# Altium PCB mini_lathe_motor_monitor.PcbDoc
Units mm, origin at the board's own origin, x right, y up, seen from the top; angles counter-clockwise.
Board outline 80 x 36 mm, 2 copper layers (1_TOP, 2_BOTTOM), stack 0.833 mm thick; 46 components, 32 nets, 155 pads, 65 vias.
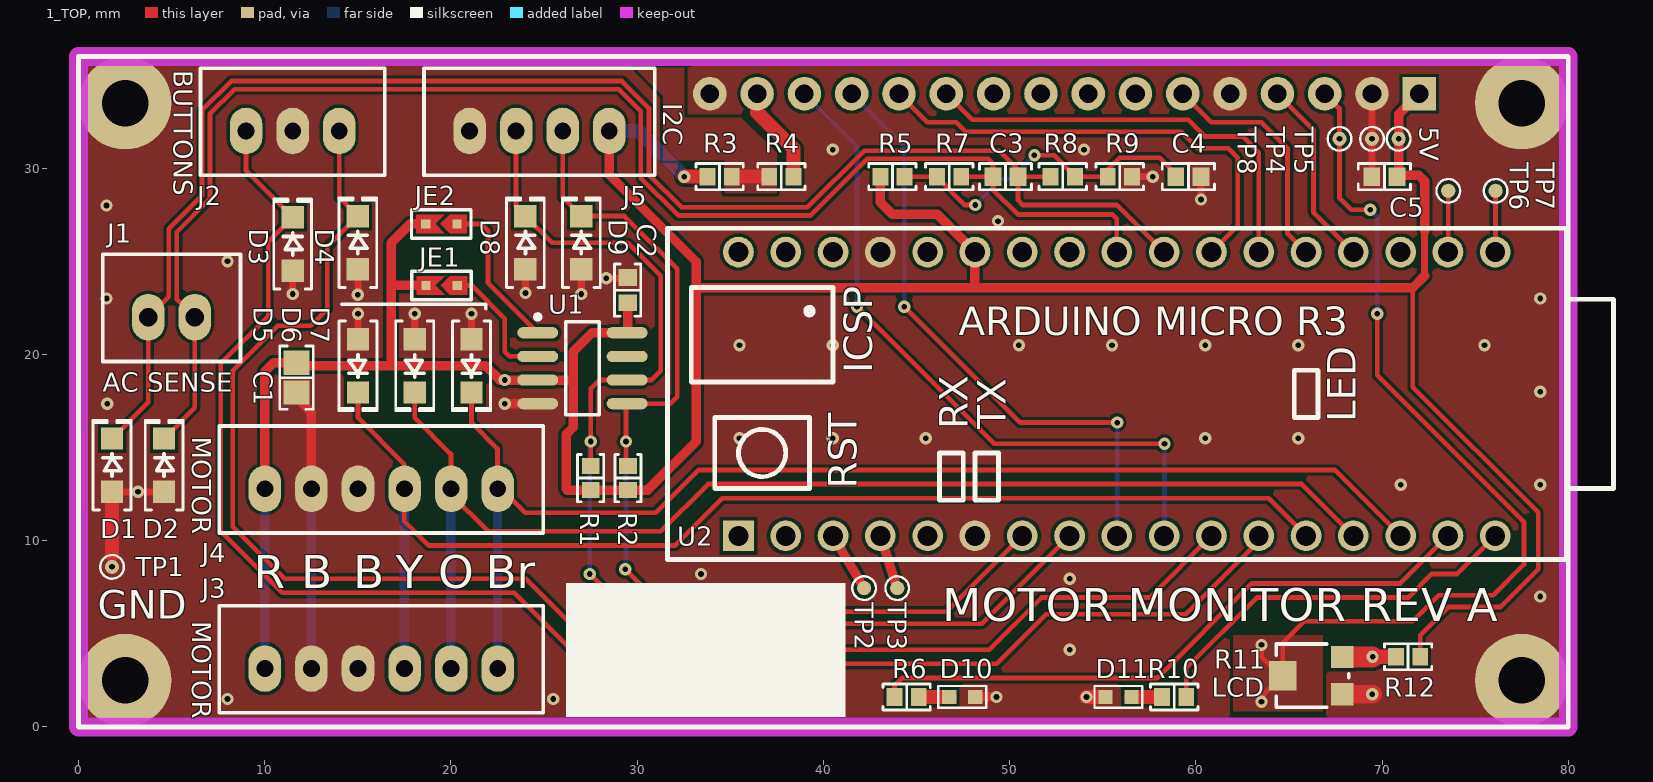
[diagram p0: 1_TOP view]
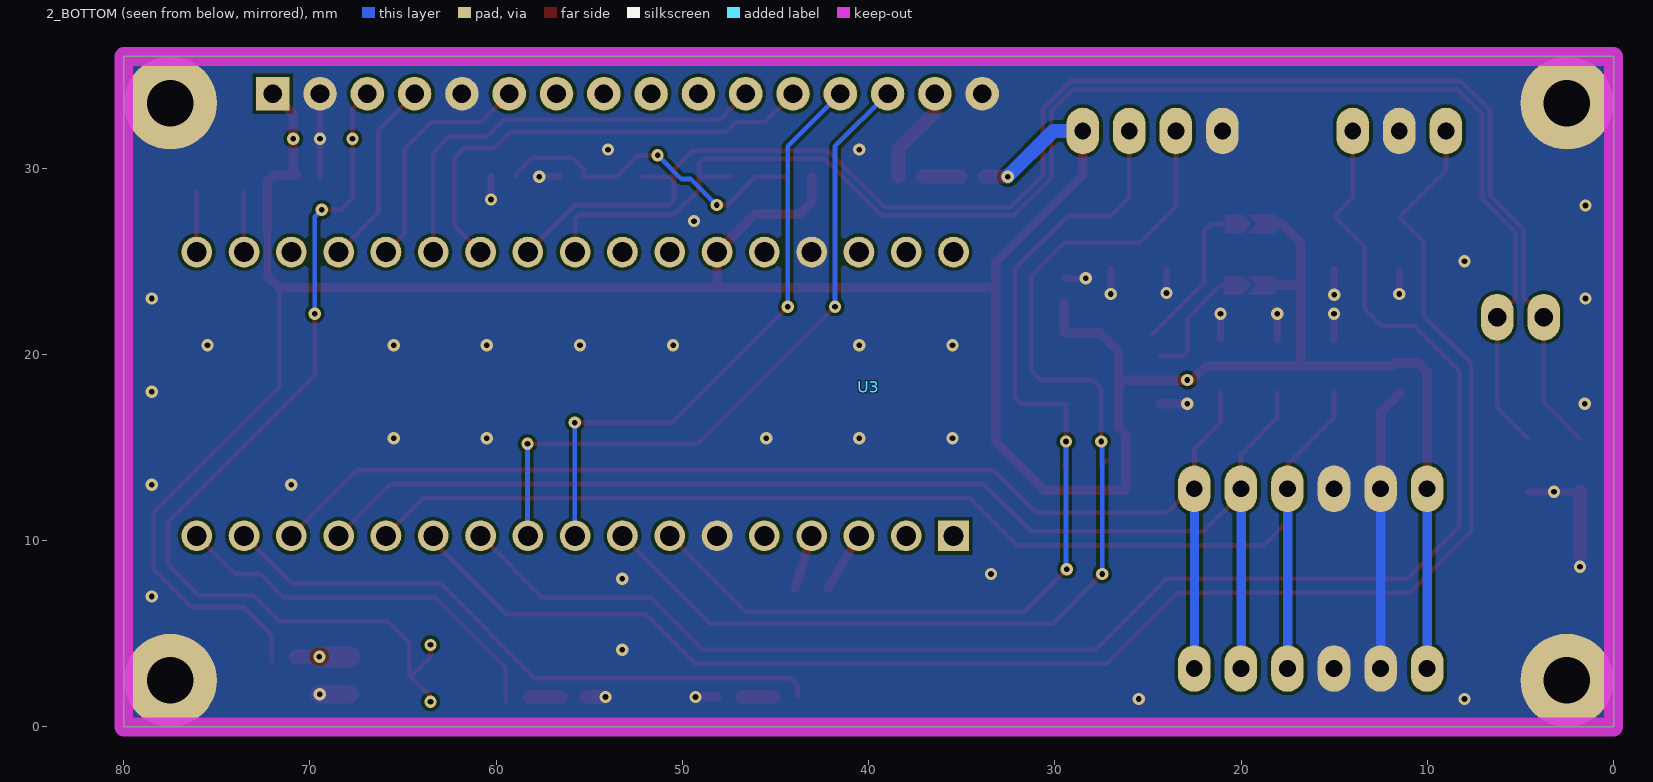
[diagram p1: 2_BOTTOM view, seen from below]
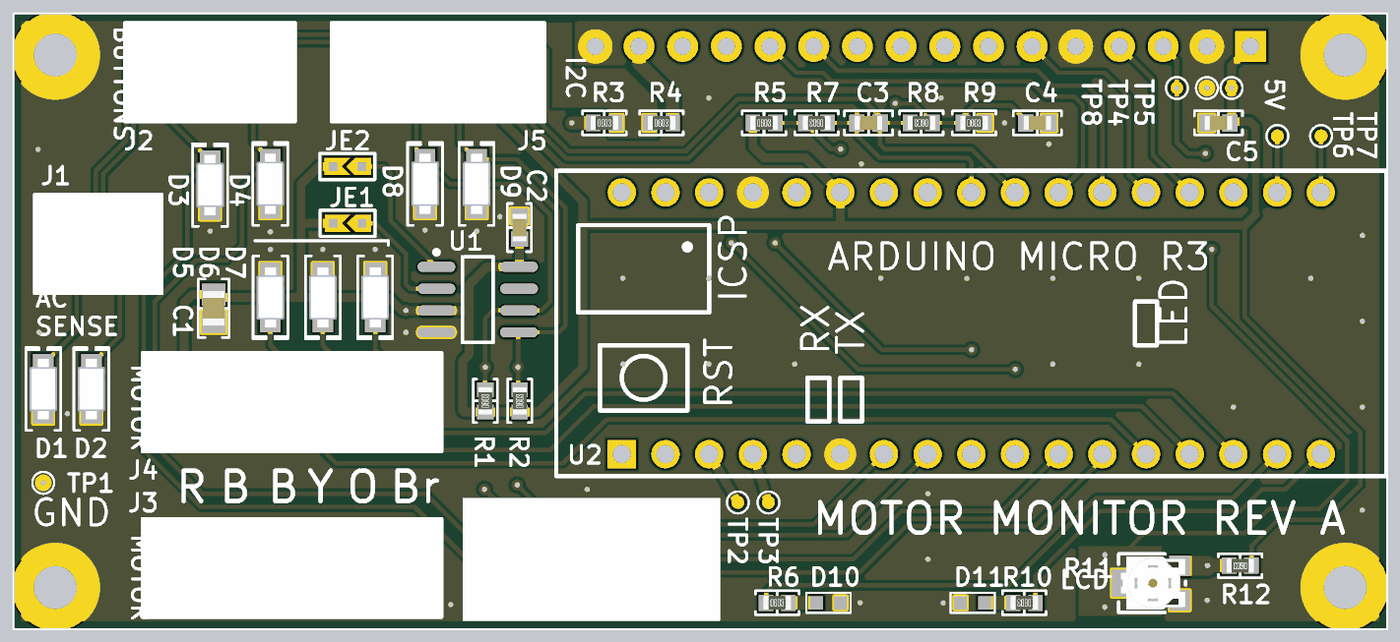
[diagram p2: 3D render of the assembled board from above, using the file's embedded part models]

## Layer stack, top to bottom
TOP SOLDERMASK: solder mask 0.0102, Solder Resist, Dk 3.5
1_TOP: signal copper 0.0356
CORE: core 0.762, FR-4, Dk 4.2
2_BOTTOM: signal copper 0.0356
BOTTOM SOLDERMASK: solder mask 0.0102, Solder Resist, Dk 3.5

## Board outline
0,0 80,0 80,36 0,36

## Design rules (kind name [scope] priority, off if disabled: settings)
BoardOutlineClearance [Not OnLayer('Keepout')] p1: gap=0.508
Clearance [Not OnLayer('Keep-Out Layer') vs Not OnLayer('Keep-Out Layer')] p1: gap=0.178
FabricationTestPointUsage TestPointUsage [All] p1: valid=0 allowmultiple=FALSE
FabricationTestpoint Testpoint [All] p1: side=3 testpointundercomponent=TRUE minsize=1.016 maxsize=2.54 preferedsize=1.524 minholesize=0 maxholesize=1.016 preferedholesize=0.813 testpointgrid=0.025 allowsidetop=TRUE allowsidebottom=TRUE usegrid=TRUE gridtolerance=0
HoleSize [All] p1: absolutevalues=TRUE maxlimit=6.35 minlimit=0.025 maxpercent=80.000 minpercent=20.000
PlaneConnect [All] p1: planeconnectstyle=Direct reliefexpansion=0.508 reliefentries=4 reliefconductorwidth=0.254 reliefairgap=0.254
PolygonConnect [All] p1: connectstyle=Direct reliefconductorwidth=0.254 reliefentries=4 polygonreliefangle="90 Angle" airgapwidth=0.254
RoomDefinition mini_lathe_motor_monitor [InComponentClass('mini_lathe_motor_monitor')] p1: confinementstyle=ConfineIn formatcopy=TRUE lockcomponents=FALSE outline -1.475,-0.678 56.945,-0.678 56.945,88.222 -1.475,88.222
RoutingVias [All] p1: holewidth=0.305 width=0.66 viastyle="Through Hole" minholewidth=0.305 minwidth=0.66 maxholewidth=0.508 maxwidth=0.889
SilkToSolderMaskClearance SilkscreenOverComponentPads [IsPad] p1: minsilkscreentomaskgap=0.254 clearancetoexposedcopper=TRUE
SolderMaskExpansion [All] p1: expansion=0.102
Width [All] p1: maxlimit=2.54 minlimit=0.152 preferedwidth=0.152
25 further rules are at their usual default settings.

## Components (designator, comment, footprint, x,y, rotation, side; value= is the part's Value field where it differs from the comment)
C1 "10uF" "CAP 0805/2012" 11.708,18.753 r270 top (schematic designator C2)
C2 "0.10uF" "CAP 0603/1608" 29.488,23.452 r270 top (schematic designator C3)
C3 "0.10uF" "CAP 0603/1608" 49.781,29.548 r180 top (schematic designator C5)
C4 "0.10uF" "CAP 0603/1608" 59.6,29.548 r180 top
C5 "0.10uF" "CAP 0603/1608" 70.128,29.548 r0 top (schematic designator C1)
D1 "SMF5.0A" SOD123F 1.802,14.054 r90 top (schematic designator D9)
D2 "SMF5.0A" SOD123F 4.596,14.054 r90 top (schematic designator D8)
D3 "SMF5.0A" SOD123F 11.5,25.93 r90 top (schematic designator D4)
D4 "SMF5.0A" SOD123F 15,26 r90 top (schematic designator D1)
D5 "SMF5.0A" SOD123F 15.01,19.388 r270 top
D6 "SMF5.0A" SOD123F 18.058,19.388 r270 top
D7 "SMF5.0A" SOD123F 21.106,19.388 r270 top
D8 "SMF5.0A" SOD123F 24,26 r90 top (schematic designator D11)
D9 "SMF5.0A" SOD123F 27,26 r90 top (schematic designator D10)
D10 "RUN" 0603R-GENERIC 46.76,1.608 r0 top (schematic designator D2)
D11 "Debug1" 0603R-GENERIC 56.539,1.608 r180 top (schematic designator D3)
J1 "B2B-XH-A(LF)(SN)" "JST XH B2B-XH-A" 5,22 r180 top (schematic designator J4)
J2 "B3B-XH-A(LF)(SN)" "JST XH B3B-XH-A" 11.5,32 r180 top
J3 "B6B-XH-A(LF)(SN)" "JST XH B6B-XH-A" 16.26,3.132 r180 top (schematic designator J1)
J4 "B6B-XH-A(LF)(SN)" "JST XH B6B-XH-A" 16.26,12.784 r180 top (schematic designator J3)
J5 "B4B-XH-A(LF)(SN)" "JST XH B4B-XH-A" 24.75,32 r180 top
JE1 "Jumper" SOLDER_JUMPER1 19.344,23.706 r180 top
JE2 "Jumper" SOLDER_JUMPER1 19.328,27.008 r180 top
R1 "2.2k" "RES 0603/1608" 27.504,13.364 r90 top (schematic designator R3)
R2 "2.2k" "RES 0603/1608" 29.504,13.364 r90 top (schematic designator R4)
R3 "51" "RES 0603/1608" 34.426,29.548 r0 top (schematic designator R2)
R4 "51" "RES 0603/1608" 37.743,29.548 r0 top (schematic designator R6)
R5 "2.2k" "RES 0603/1608" 43.71,29.548 r0 top
R6 "2.2k" "RES 0603/1608" 44.474,1.608 r0 top (schematic designator R8)
R7 "51" "RES 0603/1608" 46.758,29.548 r180 top (schematic designator R10)
R8 "51" "RES 0603/1608" 52.854,29.548 r180 top (schematic designator R11)
R9 "2.2k" "RES 0603/1608" 55.917,29.548 r0 top (schematic designator R7)
R10 "2.2k" "RES 0603/1608" 58.84,1.608 r180 top (schematic designator R9)
R11 "2k" "POT Panasonic EVM" 66.318,2.751 r90 top (schematic designator R1)
R12 "2.2k" "RES 0603/1608" 71.398,3.767 r180 top (schematic designator R555)
TP1 "TESTPOINT" TESTPOINT_ROUND_30MIL 1.802,8.593 r90 top (schematic designator TP6)
TP2 "TESTPOINT" TESTPOINT_ROUND_30MIL 42.188,7.45 r90 top (schematic designator TP4)
TP3 "TESTPOINT" TESTPOINT_ROUND_30MIL 43.966,7.45 r90 top (schematic designator TP5)
TP4 "TESTPOINT" TESTPOINT_ROUND_30MIL 69.46,31.58 r90 top (schematic designator TP20)
TP5 "TESTPOINT" TESTPOINT_ROUND_30MIL 70.89,31.58 r90 top (schematic designator TP2)
TP6 "TESTPOINT" TESTPOINT_ROUND_30MIL 73.557,28.786 r90 top (schematic designator TP7)
TP7 "TESTPOINT" TESTPOINT_ROUND_30MIL 76.097,28.786 r90 top (schematic designator TP1)
TP8 "TESTPOINT" TESTPOINT_ROUND_30MIL 67.715,31.58 r90 top
U1 "FM24C04B-G" SO8_N 27.062,19.261 r0 top (schematic designator U4)
U2 "ArduinoMicroR3" ARDUINO_MICRO_R3 31.63,8.99 r90 top locked (schematic designator U1)
U3 "WH1602B1" WH1602B1 80,36 r180 bottom locked (schematic designator U2)

## Footprints (in the part's own frame and the unit in brackets; to place one, negate y for a bottom-side part, rotate by r counter-clockwise, add the part's x,y. Pads: shape width x height; smd on the part's side, far side on the other; paste and mask are expansions set on the pad)
0603R-GENERIC [mil] "RESISTOR 0603"
  rect 30x30 smd: 1(0,0) 2(55,0)
  silkscreen extent -23,-23 78,23, body extent -4,-15 59,15, height 19
ARDUINO_MICRO_R3 [mil] "Arduino Micro R3"
  rect 65x65 hole 42: 1(50,-150)
  round 65 hole 42: 2(50,-250) 3(50,-350) 4(50,-450) 5(50,-550) 6(50,-650) 7(50,-750) 8(50,-850) 9(50,-950) 10(50,-1050) 11(50,-1150) 12(50,-1250) 13(50,-1350) 14(50,-1450) 15(50,-1550) 16(50,-1650) 17(50,-1750) 18(650,-1750) 19(650,-1650) 20(650,-1550) 21(650,-1450) 22(650,-1350) 23(650,-1250) 24(650,-1150) 25(650,-1050) 26(650,-950) 27(650,-850) 28(650,-750) 29(650,-650) 30(650,-550) 31(650,-450) 32(650,-350) 33(650,-250) 34(650,-150)
  silkscreen extent 0,-2000 700,0
"CAP 0603/1608" [mm] "Chip Capacitor, 2-Leads, Body 1.60x0.80mm, IPC Medium Density"
  rect 0.9x1 smd: 1(-0.675,0) 2(0.675,0)
  silkscreen extent -1.4,-0.7 1.4,0.7, body extent -0.8,-0.41 0.8,0.41, height 0.82
"CAP 0805/2012" [mm] "Chip Capacitor, 2-Leads, Body 2.00x1.20mm, IPC Medium Density"
  rect 1.3x1.4 smd: 1(-0.8,0) 2(0.8,0)
  silkscreen extent -1.7,-0.9 1.7,0.9, body extent -1,-0.64 1,0.64, height 1.26
"JST XH B2B-XH-A" [mm]
  oval 1.75x2.5 hole 1: 1(-1.25,0) 2(1.25,0)
  silkscreen extent -3.7,-3.38 3.7,2.38, body extent -3.7,-3.38 3.7,2.38, height 7
"JST XH B3B-XH-A" [mm]
  oval 1.75x2.5 hole 0.9: 1(-2.5,0) 2(0,0) 3(2.5,0)
  silkscreen extent -4.95,-3.38 4.95,2.38, body extent -4.95,-3.38 4.95,2.38, height 7
"JST XH B4B-XH-A" [mm]
  oval 1.75x2.5 hole 0.9: 1(-3.75,0) 2(-1.25,0) 3(1.25,0) 4(3.75,0)
  silkscreen extent -6.2,-3.38 6.2,2.38, body extent -6.2,-3.38 6.2,2.38, height 7
"JST XH B6B-XH-A" [mm]
  oval 1.75x2.5 hole 0.9: 1(-6.25,0) 2(-3.75,0) 3(-1.25,0) 4(1.25,0) 5(3.75,0) 6(6.25,0)
  silkscreen extent -8.7,-3.38 8.7,2.38, body extent -8.7,-3.38 8.7,2.38, height 7
"POT Panasonic EVM" [mm] "Panasonic EVM3Y 3.45mm x 3.10mm x 1.55mm"
  rect 1.2x1.2 smd: 1(-1,-1.55) 3(1,-1.55)
  rect 1.6x1.5 smd: 2(0,1.65)
  silkscreen extent -1.7,-1.9 1.7,2, body extent -1.55,-1.9 1.55,1.85, height 1.55
"RES 0603/1608" [mm] "Chip Resistor, 2-Leads, Body 1.60x0.80mm, IPC Medium Density"
  rect 0.85x0.95 smd: 1(-0.65,0) 2(0.65,0)
  silkscreen extent -1.27,-0.7 1.27,0.7, body extent -0.8,-0.4 0.8,0.4, height 0.45
SO8_N [mm] "SOIC, 8-Leads, Body 4.9x3.9mm, Pitch 1.27mm, IPC Medium Density"
  oval 2.2x0.6 smd: 1(-2.4,1.905) 2(-2.4,0.635) 3(-2.4,-0.635) 4(-2.4,-1.905) 5(2.4,-1.905) 6(2.4,-0.635) 7(2.4,0.635) 8(2.4,1.905)
  silkscreen extent -2.52,-2.5 0.9,2.88, body extent -2,-2.5 2,2.5, height 1.75
SOD123F [mm] "SODFL, 2-Leads, Body 1.60x3.50mm, IPC Medium Density"
  rect 1.2x1.2 smd: 1(-1.43,0) 2(1.43,0)
  silkscreen extent -2.41,-1.02 2.41,1.02, body extent -1.75,-0.8 1.75,0.8, height 1.1
SOLDER_JUMPER1 [mm]
  rect 0.5x0.5 smd: 1(-1,0) 2(0.686,0)
  1_TOP region: -0.322,0.5 0.178,0 -0.322,-0.5 1.178,-0.5 1.178,0.5
  1_TOP region: -0.1,0 -0.6,0.5 -1.525,0.5 -1.525,-0.5 -0.6,-0.5
  silkscreen extent -1.75,-0.76 1.45,0.76
TESTPOINT_ROUND_30MIL [mil]
  round 30 smd paste-30: 1(0,0)
  silkscreen extent -25,-25 25,25
WH1602B1 [mm]
  rect 1.8x1.8 hole 1: 1(8,-2)
  round 1.8 hole 1: 2(10.54,-2) 3(13.08,-2) 4(15.62,-2) 5(18.16,-2) 6(20.7,-2) 7(23.24,-2) 8(25.78,-2) 9(28.32,-2) 10(30.86,-2) 11(33.4,-2) 12(35.94,-2) 13(38.48,-2) 14(41.02,-2) 15(43.56,-2) 16(46.1,-2)
  round 5 hole 2.5: M1(2.5,-2.5) M2(2.5,-33.5) M3(77.5,-33.5) M4(77.5,-2.5)

## Part data
C1: library part 13702, "CAP CER 10UF 10V X7R 0805"
C2 C3 C4 C5: library part 12948, "CAP CER 0.1UF 16V X7R 0603"
D1 D2 D3 D4 D5 D6 D7 D8 D9: library part 7758, "TVS DIODE 5VWM 9.2VC SOD123"
D10 D11: library part LED2, "Typical RED, GREEN, YELLOW, AMBER GaAs LED"
J1: library part 16449, "CONN HEADER XH TOP 2POS 2.5MM"
J2: library part 16450, "CONN HEADER XH TOP 3POS 2.5MM"
J3 J4: library part 16453, "CONN HEADER XH TOP 6POS 2.5MM"
J5: library part 16451, "CONN HEADER XH TOP 4POS 2.5MM"
JE1 JE2: "Jumper Wire"
R1 R2 R5 R6 R9 R10 R12: library part 11184, "RES SMD 2.2K OHM 5% 1/10W 0603"
R3 R4 R7 R8: library part 11421, "RES SMD 51 OHM 5% 1/4W 0603"
R11: library part 7179, "TRIMMER 2K OHM 0.15W SMD"
U1: library part CAT24C256, "FM24C04B FRAM"
U2: "Arduino Micro R3"
U3: library part LCD, "2x16 LCD"

## Free pads (board coordinates)
  round 0.8 on Top Solder: MNT(67.715,31.58) MNT(69.46,31.58) MNT(70.89,31.58)

## Via types
v1: diameter 0.66, hole 0.305, 1_TOP to 2_BOTTOM, tented both sides, 65 vias

## Nets (pads, with @x,y where several pads share a name; then routed paths per layer and width w, separated by ;. In a path a pad name is that pad's centre, name@x,y a point inside that pad or via, vN(x,y) a via of type N, cw(c..) or ccw(c..) an arc to the next point about the centre after c; other vN are vias at no path point)
5V: C1.1 C2.2 C5.2 J3.6 J4.6 J5.1 JE1.2 JE2.2 R1.1 R2.1 R3.1 R5.1 R12.1 TP5.1 U1.3 U1.8 U2.29 U3.1 | length 176.5
  1_TOP w0.254: 71.652,23.579 71.652,18.245 78.383,11.514 78.383,8.466 76.351,6.434 73.557,6.434 72.048,4.925 R12.1 R12.1@72.048,3.513
  1_TOP w0.381: 72.287,24.214 72.287,26.627
  1_TOP w0.508: J4.6@10,13 10,19.077 10.476,19.553 C1.1@11.454,19.553 ; C1.1 11.873,19.388 16.788,19.388 ; JE1.2 16.788,23.706 ; JE2.2@18.658,27.008 JE2.2 17.804,27.008 16.788,25.992 16.788,23.706 ; J5.1 28.5,29.647 33.171,24.976 33.171,23.579 ; C2.2 29.488,21.166 U1.8 27.583,21.166 26.567,20.15 26.567,18.626 ; R5.1 43.06,28.168 43.712,27.516 46.124,27.516 U2.29 48.14,23.579 ; U3.1 70.89,32.89 v1(70.89,31.58) 70.89,29.781 70.73,29.621 71.975,29.621 72.287,29.309 72.287,26.627 ; 72.287,24.214 71.652,23.579 48.14,23.579 ; 16.788,19.388 16.788,23.706 ; 16.788,19.388 21.868,19.388 22.63,18.626 v1(22.884,18.626) U1.3 26.567,18.626 ; 26.567,18.626 26.567,16.086 26.186,15.705 26.186,12.784 26.256,12.714 R1.1 R2.1 30.561,12.714 33.171,15.324 33.171,23.579 ; 33.171,23.579 48.14,23.579
  1_TOP w0.762: v1(32.536,29.548) R3.1
  2_BOTTOM w0.508: J3.6 J4.6
  2_BOTTOM w0.762: J5.1 30.084,32 v1(32.536,29.548)
AC_N: C3.1 D1.2 J1.2 R8.2 U2.25 | length 83.1
  1_TOP w0.254: D1.2 3.75,17.432 J1.2 4.85,23.1 4.85,26.754 6.628,28.532 6.628,33.104 8.203,34.679 29.183,34.679 30.631,33.231 30.631,29.651 32.385,27.897 39.14,27.897 42.188,30.945 49.44,30.945 50.456,29.929 C3.1 ; R8.2 C3.1 ; U2.25 55.776,28.024 50.71,28.024 50.456,28.278 C3.1
AC_P: C3.2 D2.2 J1.1 R7.1 U2.26 | length 80.3
  1_TOP w0.254: D2.2 6.25,17.138 J1.1 5.282,22.968 5.282,26.575 7.06,28.353 7.06,32.925 8.382,34.247 29.004,34.247 30.199,33.052 30.199,29.472 32.206,27.465 39.319,27.465 42.367,30.513 48.856,30.513 49.106,30.263 C3.2 ; R7.1 C3.2 ; U2.26 55.76,27.279 55.523,27.516 50.443,27.516 49.106,28.853 C3.2
BUTTON1: D4.2 J2.1 U2.11 | length 83.3
  1_TOP w0.254: J2.1 14,28.43 D4.2 13.359,25.789 13.359,22.436 12.47,21.547 10.692,21.547 8.279,19.134 8.279,10.752 11.073,7.958 24.027,7.958 27.837,4.148 48.919,4.148 51.713,6.942 57.522,6.942 U2.11
BUTTON2: D3.2 J2.3 U2.12 | length 85.8
  1_TOP w0.254: J2.3 9,29.86 D3.2 10.184,26.044 10.184,22.055 7.644,19.515 7.644,10.498 10.946,7.196 23.392,7.196 27.202,3.386 49.3,3.386 51.967,6.053 59.46,6.053 63.38,9.973 U2.12
GND: C1.2 C2.1 C4.1 C5.1 D1.1 D2.1 D3.1 D4.1 D5.1 D6.1 D7.1 D8.1 D9.1 D10.2 D11.2 J2.2 J3.4 J3.5 J4.4 J4.5 J5.4 R9.2 R11.1 TP1.1 TP4.1 U1.4 U2.6 U2.31 U3.2 U3.5 U3.16 U3.M1 U3.M2 U3.M3 U3.M4 | length 43.1
  1_TOP w0.381: D1.1 v1(3.199,12.624) D2.1 ; v1(11.5,23.244) D3.1 ; v1(15,23.208) D4.1 ; D5.1 v1(15.01,22.182) ; D6.1 v1(18.058,22.182) ; D7.1 v1(21.106,22.182) ; v1(24,23.298) D8.1 ; v1(27,23.25) D9.1 ; v1(28.345,24.087) 29.448,24.087 C2.1 ; R9.2 v1(57.695,29.548) ; v1(60.275,28.318) C4.1 ; C5.1 69.453,30.397 69.46,30.404 v1(69.46,31.58) U3.2
  1_TOP w0.508: C1.2@11.454,17.953 12.5,16.907 J4.5@12.5,13 ; v1(22.884,17.356) U1.4@24.339,17.356 ; D10.2 v1(49.3,1.608)
  1_TOP w0.762: 1.802,9.228 D1.1 ; v1(54.126,1.608) D11.2
  1_TOP w1.016: R11.1 v1(69.477,1.751)
  2_BOTTOM w0.508: J3.5@12.5,4 J4.5@12.5,13
  other v1: 8,1.5 25.5,1.5 53.237,4.148 78.5,7 53.237,7.958 33.425,8.212 1.802,8.593 71,13 78.5,13 35.5,15.5 40.5,15.5 45.5,15.5 60.5,15.5 65.5,15.5 1.548,17.356 78.5,18 35.5,20.5 40.5,20.5 50.5,20.5 55.5,20.5 60.5,20.5 65.5,20.5 75.5,20.5 1.5,23 78.5,23 8,25 49.376,27.16 1.5,28 40.5,31 54,31
HALL_A: D5.2 J3.3 J4.3 U2.13 | length 68.4
  1_TOP w0.254: D5.2 15.01,16.594 17.5,14.104 17.5,11.056 18.82,9.736 32.028,9.736 34.568,12.276 63.904,12.276 U2.13
  2_BOTTOM w0.508: J3.3@17.5,3.132 J4.3@17.5,12.784
HALL_B: D6.2 J3.2 J4.2 U2.14 | length 67.4
  1_TOP w0.254: D6.2 18.058,16.594 20,14.652 20,12.5 22,10.5 31.268,10.5 33.806,13.038 65.682,13.038 U2.14
  2_BOTTOM w0.508: J3.2@20,3.132 J4.2@20,12.784
HALL_C: D7.2 J3.1 J4.1 U2.15 | length 66.7
  1_TOP w0.254: D7.2 21.106,16.34 22.5,14.946 22.5,13 24,11.5 31,11.5 33.3,13.8 67.46,13.8 U2.15
  2_BOTTOM w0.508: J3.1@22.5,3.132 J4.1@22.5,12.784
LCD_DB4: U2.23 U3.11 | length 23.4
  1_TOP w0.254: U3.11 48.004,32.596 59.587,32.596 60.476,31.707 62.508,31.707 63.38,30.835 U2.23
LCD_DB5: U2.24 U3.12 | length 25.3
  1_TOP w0.254: U3.12 45.591,32.469 47.141,32.469 47.649,31.961 59.206,31.961 60.095,31.072 61.746,31.072 62.254,30.564 62.254,26.914 U2.24
LCD_DB6: U2.9 U3.13 | length 32.8
  1_TOP w0.254: v1(44.347,22.563) 50.57,16.34 v1(55.777,16.34)
  1_TOP w0.508: U2.9 U2.9@55.904,10.244
  2_BOTTOM w0.254: U3.13 44.347,31.173 v1(44.347,22.563) ; U2.9 55.777,10.277 v1(55.777,16.34)
LCD_DB7: U2.10 U3.14 | length 37.1
  1_TOP w0.254: v1(41.807,22.563) 49.173,15.197 v1(58.317,15.197)
  2_BOTTOM w0.254: U3.14 41.807,31.173 v1(41.807,22.563) ; U2.10 58.317,10.277 v1(58.317,15.197)
LCD_E: U2.22 U3.6 | length 12.8
  1_TOP w0.254: U3.6 60.831,32.469 63.524,32.469 64.921,31.072 64.921,26.499 U2.22
LCD_RS: U2.21 U3.4 | length 10.2
  1_TOP w0.254: U3.4 66.318,32.062 66.318,27.642 U2.21
LED_GREEN: R6.1 U2.16 | length 33.7
  1_TOP w0.254: R6.1 43.824,2.228 44.22,2.624 57.936,2.624 63.016,7.704 70.984,7.704 U2.16
LED_RED: R10.1 U2.17 | length 21.3
  1_TOP w0.254: R10.1@59.49,1.354 R10.1 59.49,3.162 63.27,6.942 71.398,6.942 72.668,8.212 74.032,8.212 U2.17
NetC4_2: C4.2 R5.2 R7.2 R8.1 R9.1 | length 18.1
  1_TOP w0.254: R5.2 R7.2 46.108,29.517 47.601,28.024 v1(48.157,28.024) ; v1(51.332,30.691) 52.392,30.691 53.504,29.579 R8.1 R9.1 ; R9.1@55.369,29.548 R9.1 ; C4.2 58.925,29.702 58.063,30.564 55.904,30.564 55.267,29.927 R9.1
  2_BOTTOM w0.254: v1(48.157,28.024) 49.554,29.421 50.062,29.421 v1(51.332,30.691)
NetD10_1: D10.1 R6.2 | length 1.6
  1_TOP w0.762: R6.2 D10.1
NetD11_1: D11.1 R10.2 | length 1.7
  1_TOP w0.762: D11.1 R10.2
NetJE1_1: JE1.1 U1.2 | length 6.6
  1_TOP w0.254: JE1.1 21.106,23.706 22.884,21.928 22.884,20.15 23.138,19.896 U1.2@24.339,19.896
NetJE2_1: JE2.1 U1.1 | length 8.9
  1_TOP w0.254: 20.09,26.754 20.344,27.008 21.614,27.008 21.992,26.63 21.992,23.836 U1.1 U1.1@24.789,21.039
NetR3_2: R3.2 R4.1 | length 2
  1_TOP w0.762: R3.2 R4.1
NetR4_2: R4.2 U3.15 | length 5.3
  1_TOP w0.762: U3.15 36.44,33.01 38.393,31.057 R4.2
NetR11_2: R11.2 TP8.1 U3.3 | length 50.8
  1_TOP w0.254: v1(63.524,1.354) 63.524,1.607 R11.2 ; v1(63.524,4.402) 63.524,3.767 64.54,2.751 R11.2 ; U3.3 67.715,33.205 v1(67.715,31.58) 67.715,28.405 68.35,27.77 v1(69.366,27.77) ; v1(69.747,22.182) 69.747,18.88 77.621,11.006 77.621,8.72 75.97,7.069 73.049,7.069 71.652,5.672 65.81,5.672 64.668,4.53 R11.2
  2_BOTTOM w0.254: v1(69.366,27.77) 69.747,27.389 v1(69.747,22.182)
NetR11_3: R11.3 R12.2 | length 2.9
  1_TOP w0.762: v1(69.493,3.767) R12.2
  1_TOP w1.016: v1@69.477,3.751 v1(69.493,3.767)
  1_TOP w1.143: R11.3 v1@69.477,3.751
NetTP2_1: TP2.1 U2.3 | length 3.3
  1_TOP w0.508: U2.3 TP2.1
NetTP3_1: TP3.1 U2.4 | length 3
  1_TOP w0.508: U2.4 TP3.1
NetTP6_1: TP6.1 U2.19 | length 3.3
  1_TOP w0.254: U2.19 73.557,25.517 TP6.1
NetTP7_1: TP7.1 U2.18 | length 3.3
  1_TOP w0.254: U2.18 76.097,25.517 TP7.1
SCL: D8.2 J5.3 R1.2 U1.6 U2.8 | length 63.1
  1_TOP w0.254: J5.3 23.5,27.93 D8.2 25.438,25.992 29.488,25.992 31.266,24.214 31.266,19.134 30.758,18.626 U1.6 27.964,18.626 27.504,18.166 v1(27.504,15.324) R1.2 R1.2@27.214,14.304 ; v1(27.456,8.212) 30.123,5.545 48.505,5.545 U2.8
  2_BOTTOM w0.254: v1(27.456,8.212) 27.456,15.276 v1(27.504,15.324)
SDA: D9.2 J5.2 R2.2 U1.5 U2.7 | length 55.3
  1_TOP w0.254: J5.2 26,28.43 D9.2 29.32,27.43 32.155,24.595 32.155,17.737 31.774,17.356 U1.5 29.4,17.356 v1(29.4,15.324) 29.4,14.118 R2.2 ; v1(29.361,8.466) 31.647,6.18 46.6,6.18 U2.7
  2_BOTTOM w0.254: v1(29.361,8.466) 29.4,8.505 v1(29.4,15.324)
pads on no net: U1.7 U2.1 U2.2 U2.5 U2.20 U2.27 U2.28 U2.30 U2.32 U2.33 U2.34 U3.7 U3.8 U3.9 U3.10

## Polygon pours and split planes (outlines as drawn)
no net on TOP SILKSCREEN "Top Overlay-No Net" (solid, pour order 8): 26.202,7.704 41.172,7.704 41.172,0.548 26.202,0.548
GND on 1_TOP "GND_L01_P016" (solid, remove dead copper, pour order 16): 72.414,2.624 72.414,0.846 67.207,0.846 67.207,2.624
NetR11_2 on 1_TOP "NETR11_2_L01_P012" (solid, remove dead copper, pour order 12): 62,4.91 62,0.846 66.826,0.846 66.826,4.91
NetR3_2 on 1_TOP "NETR3_2_L01_P010" (solid, remove dead copper, pour order 10): 34.695,28.659 34.695,30.437 31.393,30.437 31.393,33.866 29.869,35.39 32.536,35.39 32.536,32.723 35.584,32.723 37.489,30.818 37.489,29.929 37.489,28.659
GND on 1_TOP "GND_L01_P020" (solid, remove dead copper, pour order 20): 0,36 0,0 80,0 80,36
GND on 2_BOTTOM "GND_L02_P018" (solid, remove dead copper, pour order 18): 0,36 0,0 80,0 80,36 0,36

## Keep-outs
Keep-Out Layer:
  the board outline again, w1.016
  text "KEEPOUT" at 103.91,8.72 h1.52

## Other copper
1_TOP:
  text "1_TOP" at 103.91,21.42 h1.52
2_BOTTOM:
  text "2_BOTTOM" at 103.91,18.88 h1.52

## Silkscreen, mask and mechanical layers (free items; w line width, h text height)
TOP SILKSCREEN:
  lines w0.178: 14.121,22.69 21.868,22.69 21.868,22.436
  lines w0.254: 32,9 80,9 80,27 ; 0,0 80,0 80,36 0,36 0,0
  text "BUTTONS" at 5.104,35.263 h1.02 r270
  text "I2C" at 31.393,33.485 h1.02 r270
  text "5V" at 72.033,32.215 h1.02 r270
  text "TOP SILKSCREEN" at 103.91,26.5 h1.52
  text "ARDUINO MICRO R3" at 47.268,21.039 h1.52
  text "AC SENSE" at 1.294,17.991 h1.02
  text "MOTOR" at 6.12,15.578 h1.02 r270
  text "R" at 9.422,7.45 h1.78
  text "B" at 11.962,7.45 h1.78
  text "B" at 14.756,7.45 h1.78
  text "Y" at 17.042,7.45 h1.78
  text "O" at 19.328,7.45 h1.78
  text "Br" at 21.868,7.45 h1.78
  text "GND" at 1.04,5.799 h1.52
  text "MOTOR" at 6.12,5.672 h1.02 r270
  text "MOTOR MONITOR REV A" at 46.379,5.672 h1.78
  text "LCD" at 60.857,1.608 h1.02
BOTTOM SILKSCREEN:
  text "BOTTOM SILKSCREEN" at 103.91,13.8 h1.52
Top Paste:
  text "TOP PASTE" at 103.91,29.04 h1.52
Bottom Paste:
  text "BOTTOM PASTE" at 103.91,11.26 h1.52
TOP SOLDERMASK:
  text "TOP SOLDERMASK" at 103.91,23.96 h1.52
BOTTOM SOLDERMASK:
  text "BOTTOM SOLDERMASK" at 103.91,16.34 h1.52
Mechanical 1:
  drawing of 168 lines, arcs and shapes, not listed
  text "Layer" at 173.431,178.138 h1.52
  text "Name" at 182.276,178.138 h1.52
  text "Material" at 208.716,178.138 h1.52
  text "Thickness" at 225.543,178.138 h1.52
  text "Constant" at 238.596,178.138 h1.52
  text "Board Layer Stack" at 251.113,178.138 h1.52
  text "1" at 173.431,175.09 h1.52
  text "TOP SILKSCREEN" at 182.276,175.09 h1.52
  text "2" at 173.431,172.042 h1.52
  text "TOP SOLDERMASK" at 182.276,172.042 h1.52
  text "Solder Resist" at 208.716,172.042 h1.52
  text "0.010mm" at 225.543,172.042 h1.52
  text "3.5" at 238.596,172.042 h1.52
  text "3" at 173.431,168.994 h1.52
  text "1_TOP" at 182.276,168.994 h1.52
  text "Copper" at 208.716,168.994 h1.52
  text "0.036mm" at 225.543,168.994 h1.52
  text "4" at 173.431,165.946 h1.52
  text "CORE" at 182.276,165.946 h1.52
  text "FR-4" at 208.716,165.946 h1.52
  text "0.762mm" at 225.543,165.946 h1.52
  text "4.2" at 238.596,165.946 h1.52
  text "5" at 173.431,162.898 h1.52
  text "2_BOTTOM" at 182.276,162.898 h1.52
  text "Copper" at 208.716,162.898 h1.52
  text "0.036mm" at 225.543,162.898 h1.52
  text "6" at 173.431,159.85 h1.52
  text "BOTTOM SOLDERMASK" at 182.276,159.85 h1.52
  text "Solder Resist" at 208.716,159.85 h1.52
  text "0.010mm" at 225.543,159.85 h1.52
  text "3.5" at 238.596,159.85 h1.52
  text "7" at 173.431,156.802 h1.52
  text "BOTTOM SILKSCREEN" at 182.276,156.802 h1.52
  text "TOTAL THICKNESS 0.8 MM +/- 10%" at 171.601,152.865 h1.52
  text "FABRICATION NOTES, UNLESS OTHERWISE SPECIFIED:" at 171.22,88.73 h1.52
  text "1. DIMENSIONS ARE IN MM." at 172.49,84.92 h1.52
  text "2. PCB FABRICATION SHALL BE COMPLIANT TO THE LATEST REVISION OF IPC-6012, CLASS 2." at 172.49,82.38 h1.52
  text "3. LAYERS SHALL BE CONSTRUCTED AS INDICATED IN STACKUP." at 172.49,79.84 h1.52
  text "4. LPI OR LDI SOLDERMASK SHALL BE APPLIED AS INDICATED. COLOR GREEN." at 172.49,77.3 h1.52
  text "5. EPOXY-BASED SILKSCREEN SHALL BE APPLIED AS INDICATED.  COLOR WHITE." at 172.49,74.76 h1.52
  text "6. SOLDERABLE LANDS FINISH SHALL BE LEAD FREE HASL, OR ENIG PER IPC-4552." at 172.49,72.22 h1.52
  text "7. HOLE TOLERANCE FOR HOLES LESS THAN 0.3 DIAMETER SHALL BE +0.076 / -NOMINAL" at 172.49,69.68 h1.52
  text "8. HOLE TOLERANCE FOR HOLES GREATER OR EQUAL TO 0.3 DIAMETER SHALL BE +/- 0.076" at 172.49,67.14 h1.52
  text "9. POSITIONAL TOLERANCE SHALL BE +/- 0.127" at 172.49,64.6 h1.52
  text "ASSEMBLY NOTES, UNLESS OTHERWISE SPECIFIED:" at 171.22,56.98 h1.52
  text "1. ASSEMBLY SHALL BE COMPLIANT TO THE LATEST REVISION OF J-STD-001 AND IPC-610-A CLASS 2." at 172.49,53.17 h1.52
  text "2. SOLDER FLUX SHALL BE LOW ACTIVITY L0 OR L1 NO CLEAN FLUX.  FLUX RESIDUE SHALL BE CLEANED." at 172.49,50.63 h1.52
  text "3. WATER SOLUBLE FLUX SHALL NOT BE USED." at 172.49,48.09 h1.52
  text "FAB DRAWING" at 239.8,-12.108 h1.78
Mechanical 16:
  lines w0.127: -65,23.325 -59.92,23.325 ; -65,83.65 -59.92,83.65 ; -65,143.975 -59.92,143.975 ; -1.5,-37 -1.5,-31.92 ; -1.5,199.22 -1.5,204.3 ; 62,-37 62,-31.92 ; 62,199.22 62,204.3 ; 125.5,-37 125.5,-31.92 ; 125.5,199.22 125.5,204.3 ; 189,-37 189,-31.92 ; 189,199.22 189,204.3 ; 196.62,-24.3 310.92,-24.3 ; 196.62,-16.68 310.92,-16.68 ; 196.62,-9.06 234.72,-9.06 ; 234.72,-31.92 234.72,-16.68 234.72,-1.44 ; 252.5,-37 252.5,-31.92 ; 252.5,199.22 252.5,204.3 ; 288.06,-31.92 288.06,-16.68 ; 310.92,23.325 316,23.325 ; 310.92,83.65 316,83.65 ; 310.92,143.975 316,143.975 ; 196.62,-31.92 161.06,-31.92 161.06,-1.44 196.62,-1.44 ; 196.62,-31.92 310.92,-31.92 ; 196.62,-31.92 196.62,-1.44 ; 196.62,-1.44 234.72,-1.44 ; 234.72,-1.44 310.92,-1.44 310.92,-31.92 ; 310.92,-31.92 310.92,199.22 -59.92,199.22 -59.92,-31.92 310.92,-31.92 ; -65,-37 -65,204.3 316,204.3 316,-37 -65,-37
  text "1" at -33.724,200.998 h1.78
  text "2" at 29.666,200.998 h1.78
  text "3" at 92.895,200.998 h1.78
  text "4" at 156.564,200.998 h1.78
  text "5" at 220.039,200.998 h1.78
  text "6" at 283.666,200.998 h1.78
  text "A" at -63.095,171.966 h1.78
  text "A" at 312.825,171.966 h1.78
  text "B" at -63.095,111.514 h1.78
  text "B" at 312.825,111.514 h1.78
  text "C" at -63.095,51.189 h1.78
  text "C" at 312.825,51.189 h1.78
  text "ENGINEER:" at 197.89,-3.98 h1.14
  text "TITLE:" at 235.99,-3.98 h1.14
  text ".ENGINEER" at 199.16,-7.028 h1.78
  text ".PCB_TITLE" at 239.8,-7.028 h1.78
  text "D" at -63.095,-9.009 h1.78
  text "D" at 312.825,-9.009 h1.78
  text "PCB DESIGNER:" at 197.89,-11.473 h1.14
  text ".PCB_DESIGNER" at 199.16,-14.648 h1.78
  text "https://github.com/" at 162.965,-16.045 h1.78
  text "bkuschak/" at 162.965,-19.22 h1.78
  text "DATE:" at 197.89,-19.22 h1.14
  text "PART NO.:" at 235.99,-19.22 h1.14
  text "REV:" at 289.33,-19.22 h1.14
  text ".PRINT_DATE" at 199.16,-22.268 h1.78
  text ".PCB_PART_NUM" at 239.8,-22.268 h1.78
  text ".PCB_REV" at 290.6,-22.268 h1.78
  text "mini_lathe_motor_monitor" at 162.965,-22.395 h1.78
  text "FILE NAME:" at 197.89,-26.84 h1.14
  text "DWG NO:" at 235.99,-26.84 h1.14
  text "SCALE:" at 289.33,-26.84 h1.14
  text ".PCB_FILE_NAME_NO_PATH" at 199.16,-29.888 h1.78
  text ".PCB_DWG_NUM" at 239.8,-29.888 h1.78
  text "1" at -33.724,-35.222 h1.78
  text "2" at 29.666,-35.222 h1.78
  text "3" at 92.895,-35.222 h1.78
  text "4" at 156.564,-35.222 h1.78
  text "5" at 220.039,-35.222 h1.78
  text "6" at 283.666,-35.222 h1.78
Drill Drawing:
  circle w0.178: c174.273,113.249 r0.847
  lines w0.178: 173.426,106.476 175.119,106.476 174.273,104.783 173.426,106.476 ; 173.426,109.016 173.849,109.016 174.273,108.593 174.696,109.016 175.119,109.016 174.696,109.439 175.119,109.863 174.696,109.863 174.273,110.286 173.849,109.863 173.426,109.863 173.849,109.439 173.426,109.016 ; 173.426,116.213 175.119,116.213 175.119,117.906 173.426,117.906 173.426,116.213 ; 173.426,120.023 174.273,120.446 175.119,120.023 174.696,120.869 175.119,121.716 174.273,121.293 173.426,121.716 173.849,120.869 173.426,120.023
  lines w0.381: 171.931,103.64 231.713,103.64 ; 171.931,122.69 231.713,122.69 ; 184.453,99.83 184.453,126.5 ; 196.672,99.83 196.672,126.5 ; 220.732,99.83 220.732,126.5 ; 171.931,99.83 231.713,99.83 231.713,126.5 171.931,126.5 171.931,99.83
  text "Symbol" at 174.217,123.833 h1.83
  text "Count" at 185.596,123.833 h1.83
  text "Hole Size" at 197.815,123.833 h1.83
  text "Plated" at 221.875,123.833 h1.83
  text "65" at 185.596,120.023 h1.52
  text "12.00mil (0.305mm)" at 197.815,120.023 h1.52
  text "PTH" at 221.875,120.023 h1.52
  text "19" at 185.596,116.213 h1.52
  text "35.43mil (0.900mm)" at 197.815,116.213 h1.52
  text "PTH" at 221.875,116.213 h1.52
  text "18" at 185.596,112.403 h1.52
  text "39.37mil (1.000mm)" at 197.815,112.403 h1.52
  text "PTH" at 221.875,112.403 h1.52
  text "34" at 185.596,108.593 h1.52
  text "42.00mil (1.067mm)" at 197.815,108.593 h1.52
  text "PTH" at 221.875,108.593 h1.52
  text "4" at 185.596,104.783 h1.52
  text "98.43mil (2.500mm)" at 197.815,104.783 h1.52
  text "PTH" at 221.875,104.783 h1.52
  text "140 Total" at 185.596,100.973 h1.52

## Dimensions
0,36 to 0,0 on Mechanical 1
80,0 to 0,0 on Mechanical 1

## Text inside footprints (layer, text, board x,y; h text height)
U2: TOP SILKSCREEN "RX" at 47.759,15.975 h1.52 r90; TOP SILKSCREEN "ICSP" at 42.63,18.99 h1.52 r90; TOP SILKSCREEN "RST" at 41.79,12.8 h1.52 r90; TOP SILKSCREEN "TX" at 49.791,15.975 h1.52 r90; TOP SILKSCREEN "LED" at 68.587,16.356 h1.52 r90
U3: Mechanical 2 "0123456789012345" at 67,13.5 h3.6; Mechanical 2 "0123456789012345" at 67,19.504 h3.6